# Altium PCB 门禁触摸板.PcbDoc
Units mil, origin at the board's own origin, x right, y up, seen from the top; angles counter-clockwise.
Board outline 4137 x 2347.85 mil, 2 copper layers (Top Layer, Bottom Layer); 33 components, 30 nets, 117 pads, 126 vias.
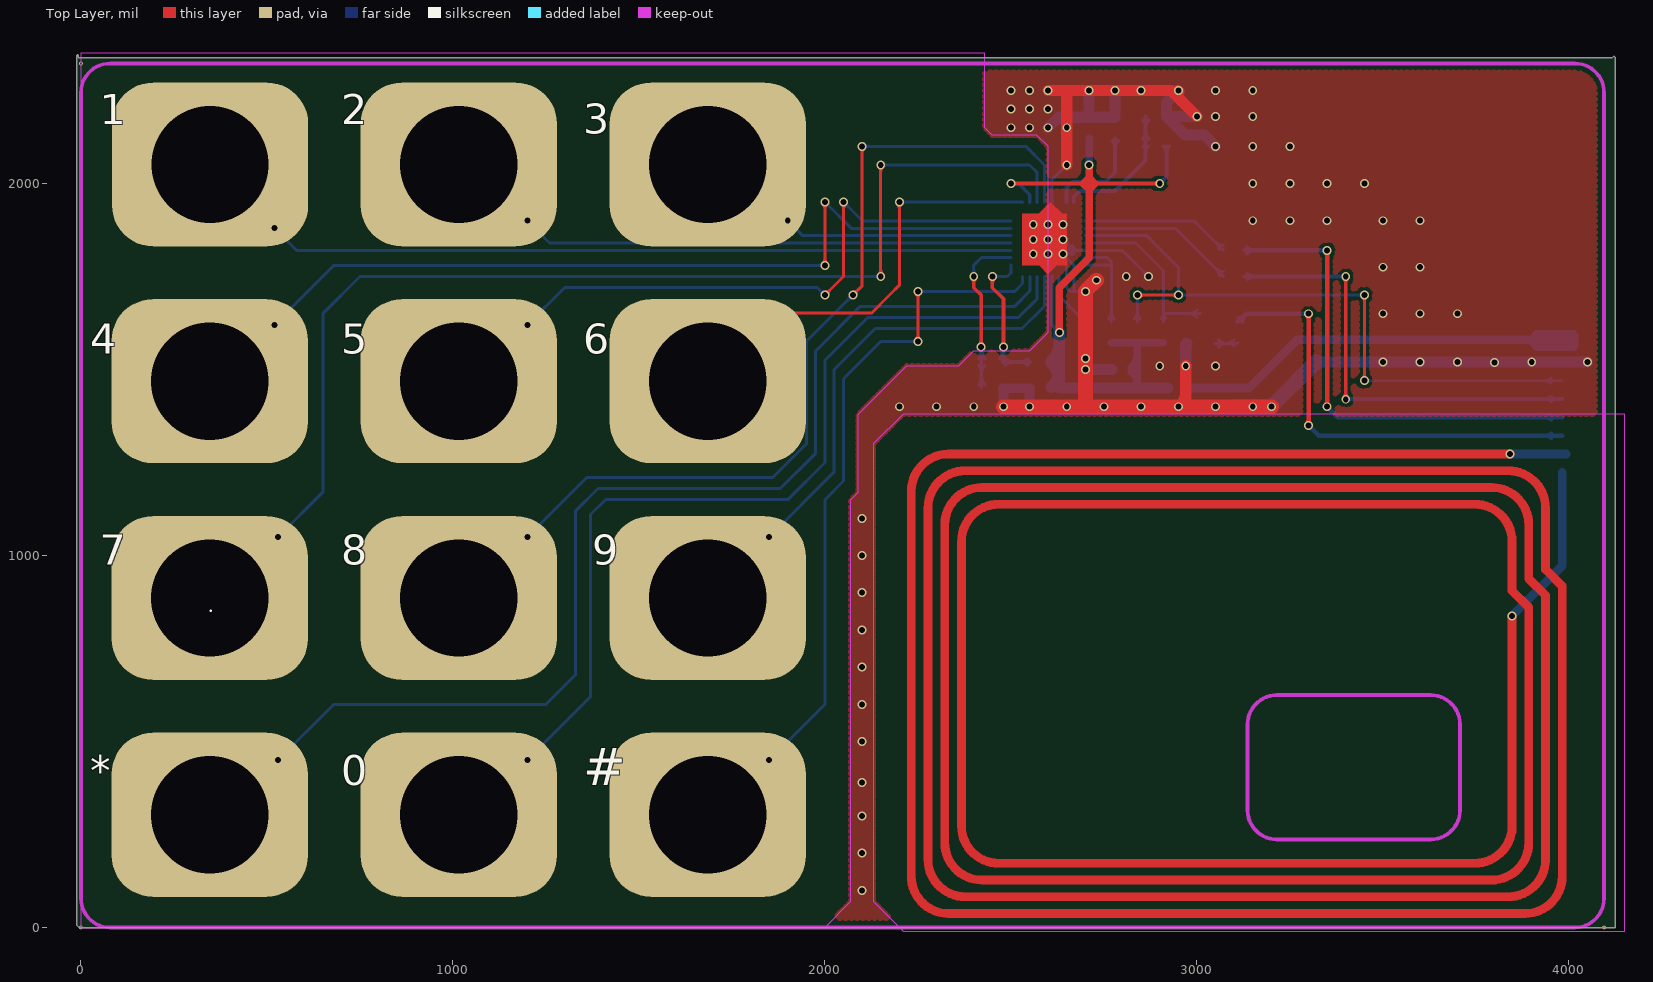
[diagram p0: Top Layer view]
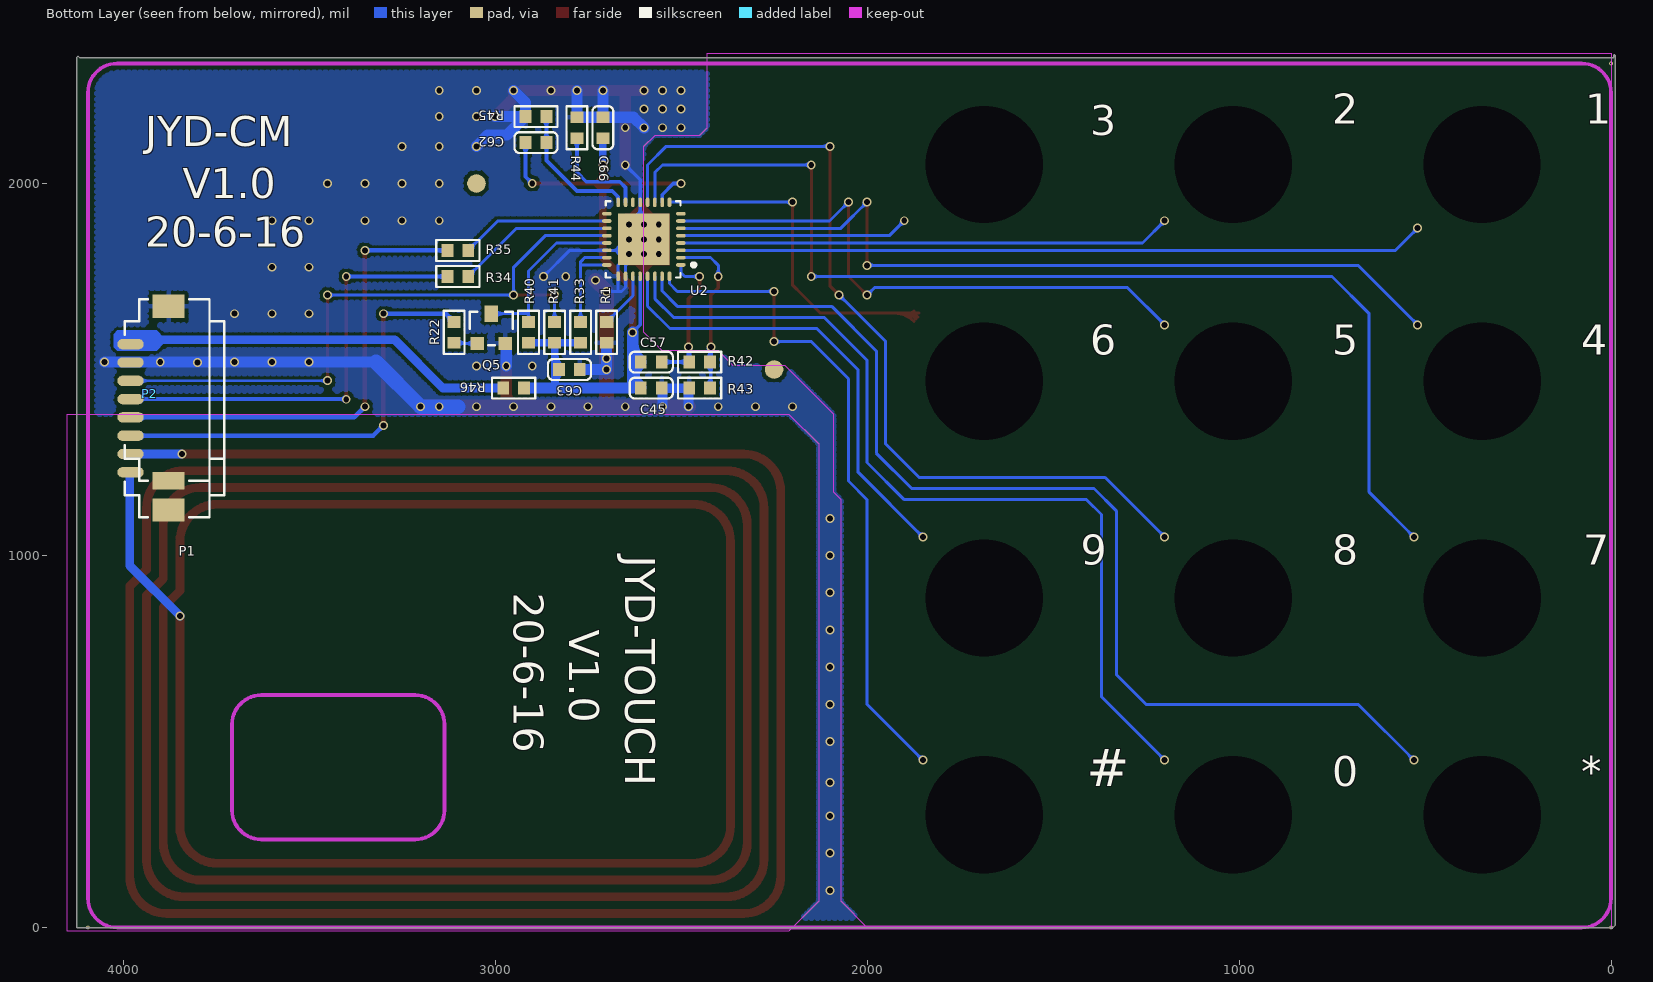
[diagram p1: Bottom Layer view, seen from below]
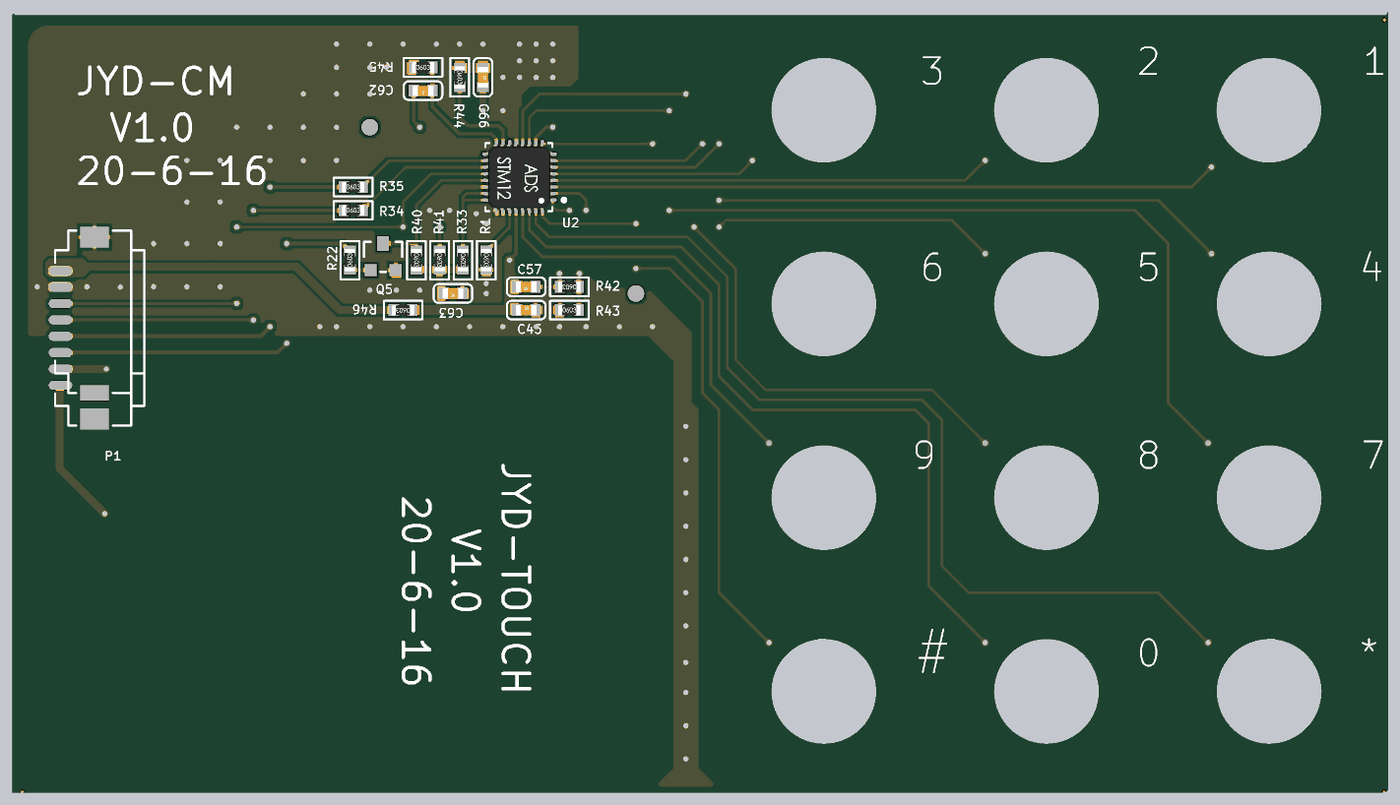
[diagram p2: 3D render of the assembled board from below, using the file's embedded part models]

## Layer stack, top to bottom
Top Layer: signal copper 1.4
Dielectric: dielectric 12.6, FR-4, Dk 4.8
Bottom Layer: signal copper 1.4

## Board outline
-8.87,2346.76 -11.87,2343.76 -11.87,6.76 -4.03,-1.09 4125.13,-1.09 4125.13,2338.76 4121.13,2342.76 4115.79,2337.42 -6.14,2337.42

## Design rules (kind name [scope] priority, off if disabled: settings)
Clearance Clearance_2 [InComponent('U2')] p1: gap=7.87
Clearance Clearance_1 [(IsThruPin)or(IsFill)or(InPoly)or(IsKeepOut) vs (IsThruPin)or(IsFill)or(InPoly)or(IsKeepOut)] p2: gap=12
Clearance [All] p3: gap=8
ComponentClearance [All] p1: gap=0 collisioncheckmode=3 verticalgap=0 showdistances=FALSE
FabricationTestpoint [(IsPad And (OnTopLayer Or OnBottomLayer))] p1: side=3 testpointundercomponent=TRUE minsize=40 maxsize=100 preferedsize=60 minholesize=0 maxholesize=40 preferedholesize=32 testpointgrid=1 allowsidetop=TRUE allowsidebottom=TRUE usegrid=TRUE gridtolerance=0.01
HoleSize [All] p1: absolutevalues=TRUE maxlimit=393.7 minlimit=1 maxpercent=80.000 minpercent=20.000
MinimumSolderMaskSliver [All] p1: minsoldermaskwidth=0
PolygonConnect PolygonConnect_1 [IsVia] p1: connectstyle=Direct reliefconductorwidth=10 reliefentries=4 polygonreliefangle="90 Angle" airgapwidth=10
PolygonConnect [All] p2: connectstyle=Relief reliefconductorwidth=12 reliefentries=4 polygonreliefangle="90 Angle" airgapwidth=10
RoutingVias [All] p1: holewidth=15.75 width=23.62 viastyle="Through Hole" minholewidth=15.75 minwidth=23.62 maxholewidth=15.75 maxwidth=23.62
SilkToSilkClearance [All] p1: silktosilkclearance=0
SilkToSolderMaskClearance [IsPad] p1: minsilkscreentomaskgap=0 clearancetoexposedcopper=TRUE
SolderMaskExpansion [All] p1: expansion=4
Width [All] p1: maxlimit=80 minlimit=5 preferedwidth=10
22 further rules are at their usual default settings.

## Components (designator, comment, footprint, x,y, rotation, side; value= is the part's Value field where it differs from the comment)
0 "PAD" 焊盘1 1015.75,303.15 r0 top (schematic designator 10)
1 "PAD" 焊盘1 347.13,2051.18 r0 top
2 "PAD" 焊盘1 1015.75,2051.18 r0 top
3 "PAD" 焊盘1 1685.04,2051.18 r0 top
4 "PAD" 焊盘1 346.46,1468.5 r0 top
5 "PAD" 焊盘1 1015.75,1468.5 r0 top
6 "PAD" 焊盘1 1685.04,1468.5 r0 top
7 "PAD" 焊盘1 346.46,885.83 r0 top
8 "PAD" 焊盘1 1015.75,885.83 r0 top
9 "PAD" 焊盘1 1685.04,885.83 r0 top
# "PAD" 焊盘1 1685.04,303.15 r0 top (schematic designator #1)
* "PAD" 焊盘1 346.46,303.15 r0 top (schematic designator *1)
C45 "1uF" 0603C 2580,1450 r180 bottom
C57 "820P 1%" 0603C 2580,1520 r0 bottom
C62 "0.1uF" 0603C 2890,2110 r0 bottom
C63 "0.1uF" 0603C 2800,1500 r0 bottom
C66 "0.1uF" 0603C 2710,2150 r270 bottom
P1 "Header 8" 8P-1.25mm 3980,1396 r90 bottom (schematic designator P?)
P2 "Header 6" 6P-1.25MM 3980,1445 r90 bottom
Q5 "PMBT3904" SOT-23-3L 3010,1610 r180 bottom
R1 "2M1%" 0603R 2700,1600 r270 bottom
R22 "10K" 0603R 3110,1600 r90 bottom
R33 "10K" 0603R 2770,1600 r270 bottom
R34 "10R" 0603R 3100,1750 r180 bottom
R35 "10R" 0603R 3100,1820 r180 bottom
R40 "10K" 0603R 2910,1600 r270 bottom
R41 "10K" 0603R 2840,1600 r270 bottom
R42 "510K1%" 0603R 2450,1520 r0 bottom
R43 "2M1%" 0603R 2450,1450 r180 bottom
R44 "36K 1%" 0603R 2780,2150 r270 bottom
R45 "330K" 0603R 2890,2180 r180 bottom
R46 "0R-空" 0603R 2950,1450 r0 bottom
U2 "TSM12M" ADS_TMS12 2600,1850 r0 bottom

## Footprints (in the part's own frame and the unit in brackets; to place one, negate y for a bottom-side part, rotate by r counter-clockwise, add the part's x,y. Pads: shape width x height; smd on the part's side, far side on the other; paste and mask are expansions set on the pad)
6P-1.25MM [mm]
  oval 0.7x1.8 smd mask+0.05: 1(-3.125,0) 2(-1.875,0) 3(-0.625,0) 4(0.625,0) 5(1.875,0) 6(3.125,0)
  rect 1.2x2.2 smd mask+0.05: 7(-6.2,-2.6)
  rect 1.6x2.2 smd mask+0.05: 8(5.7,-2.6)
  silkscreen extent -6.2,-6.4 6.2,0.4
8P-1.25mm [mm]
  oval 0.7x1.8 smd mask+0.05: 1(-4.375,0) 2(-3.125,0) 3(-1.875,0) 4(-0.625,0) 5(0.625,0) 6(1.875,0) 7(3.125,0) 8(4.375,0)
  rect 1.6x2.2 smd mask+0.05: 9(-6.95,-2.6) 10(6.95,-2.6)
  silkscreen extent -7.45,-6.4 7.45,0.4
0603C [mm]
  rect 0.8x0.9 smd: 1(-0.711,0) 2(0.711,0)
  silkscreen extent -1.47,-0.71 1.47,0.71, body extent -0.8,-0.4 0.8,0.4, height 0.3
0603R [mm]
  rect 0.8x0.9 smd: 1(-0.711,0) 2(0.711,0)
  silkscreen extent -1.47,-0.71 1.47,0.71, body extent -0.85,-0.4 0.85,0.4, height 0.56
ADS_TMS12 [mm]
  oval 0.65x0.25 smd: 1(-2.525,1.75) 2(-2.525,1.25) 3(-2.525,0.75) 4(-2.525,0.25) 5(-2.525,-0.25) 6(-2.525,-0.75) 7(-2.525,-1.25) 8(-2.525,-1.75) 17(2.525,-1.75) 18(2.525,-1.25) 19(2.525,-0.75) 20(2.525,-0.25) 21(2.525,0.25) 22(2.525,0.75) 23(2.525,1.25) 24(2.525,1.75)
  oval 0.25x0.65 smd: 9(-1.75,-2.525) 10(-1.25,-2.525) 11(-0.75,-2.525) 12(-0.25,-2.525) 13(0.25,-2.525) 14(0.75,-2.525) 15(1.25,-2.525) 16(1.75,-2.525) 25(1.75,2.525) 26(1.25,2.525) 27(0.75,2.525) 28(0.25,2.525) 29(-0.25,2.525) 30(-0.75,2.525) 31(-1.25,2.525) 32(-1.75,2.525)
  rect 3.5x3.5 smd: 33(0,0)
  silkscreen extent -3.52,-2.6 2.6,2.6, body extent -2.46,-2.49 2.54,2.51, height 0.9
SOT-23-3L [mil]
  rect 36x36 smd: 1(-37.4,-40) 2(37.4,-40)
  rect 36x43.31 smd: 3(0,40)
  silkscreen extent -57,-45 58,45
焊盘1 [mm]
  rrect50% 13.4x11.2 / inner rrect50% 13.4x11.2 / far side rect 0x0 hole 8 unplated: 1(0,0)
  round 1.2 smd: 1(4.445,4.445)

## Part data
0 1 2 3 4 5 6 7 8 9 # *: library part TestPoint, "Test Point"
C45: library part C-C?, "Electrolytic Capacitor"
C57 C62 C63 C66: library part CAP, "Capacitor"
P1: "Header, 8-Pin"
Q5: library part NPN_BJT, "Bipolar Junction Transistor"
R1 R22 R33 R40 R41 R42 R43 R44 R45: library part RES2
R34 R35: library part R_Dup1
R46: library part POWER-R

## Free pads (board coordinates)
  round 10 hole 5: 1(0,0) 2(0,2322.83) 3(4094.49,0)
  round 50 smd far side: MARK(2250,1500) MARK(3050,2000)

## Via types
v1: diameter 24, hole 16, Top Layer to Bottom Layer, tented both sides, 126 vias

## Nets (pads, with @x,y where several pads share a name; then routed paths per layer and width w, separated by ;. In a path a pad name is that pad's centre, name@x,y a point inside that pad or via, vN(x,y) a via of type N, cw(c..) or ccw(c..) an arc to the next point about the centre after c; other vN are vias at no path point)
ANTENNA: P1.1 P1.2 | length 21208.7
  Top Layer w23.62: 2232.13,135.76 2232.13,137.76 ; 3802.13,127.76 3792.13,127.76 ; 3842.13,82.76 3837.13,82.76 ; 3842.13,1227.76 3837.13,1227.76 ; v1(3842.13,1272.76) 2332.13,1272.76 ccw(c2332.13,1172.76) 2232.13,1173.76 ; 3847.13,257.76 3847.13,272.76 ; v1(3847.13,837.76) 3847.13,272.76 ; 3892.13,217.76 3892.13,227.76 ; 3937.13,177.76 3937.13,182.76 ; 3982.13,132.11 3982.13,137.76 ; 2232.13,137.76 ccw(c2332.13,137.76) 2332.13,37.76 3882.13,37.76 ccw(c3882.13,137.76) 3982.13,137.76 ; 2232.13,137.76 2232.13,1172.76 ; 2232.13,1172.76 cw(c2332.13,1172.76) 2232.13,1173.76 ; 2232.13,1172.76 cw(c2332.13,1172.76) 2232.13,1173.76 ; 2232.13,1172.76 2232.13,1173.76 ; 3792.13,127.76 ccw(c3792.13,227.76) 3892.13,227.76 ; 3792.13,127.76 2422.13,127.76 cw(c2422.13,227.76) 2322.13,227.76 2322.13,1082.76 cw(c2422.13,1082.76) 2422.13,1182.76 3792.13,1182.76 cw(c3792.13,1082.76) 3892.13,1082.76 3892.13,937.76 3937.13,892.76 3937.13,182.76 ; 3837.13,82.76 ccw(c3837.13,182.76) 3937.13,182.76 ; 3837.13,82.76 2377.13,82.76 cw(c2377.13,182.76) 2277.13,182.76 2277.13,1127.76 cw(c2377.13,1127.76) 2377.13,1227.76 3837.13,1227.76 ; 3837.13,1227.76 cw(c3837.13,1127.76) 3937.13,1127.76 3937.13,962.76 3982.13,917.76 3982.13,137.76 ; 3847.13,272.76 cw(c3747.13,272.76) 3747.13,172.76 2467.13,172.76 cw(c2467.13,272.76) 2367.13,272.76 2367.13,1037.76 cw(c2467.13,1037.76) 2467.13,1137.76 3747.13,1137.76 cw(c3747.13,1037.76) 3847.13,1037.76 3847.13,905.76 3892.13,860.76 3892.13,227.76
  Bottom Layer w23.62: v1(3842.13,1272.76) P1.2@3992.13,1272.76 ; v1(3847.13,837.76) 3982.13,972.76 P1.1@3982.13,1223.76
GND: C45.2 C63.1 C66.1 P1.7 P1.10 P2.5 P2.8 Q5.2 R1.2 R43.1 R44.1 R45.1 U2.13 U2.22 U2.25 U2.26 U2.33 | length 5695.9
  Top Layer w30: v1(2600,2250) 2650,2250 ; v1(2650,2050) v1(2650,2150) 2650,2250 ; v1@2947,2250 ccw(c2988.04,2250) 2959.02,2220.98 ; v1@2951.57,2247.44 cw(c2942.41,2262.41) 2930,2250 ; v1@2952.12,1397.88 ccw(c2908.96,1441.04) 2970,1441.04 ; 2970,1400 v1(2970,1510) ; v1(3000,2180) 2930,2250 ; 2650,2250 v1(2710,2250) v1(2780,2250) v1(2850,2250) 2930,2250
  Top Layer w40: v1(2480,1400) v1(2550,1400) 2700,1400 ; v1(2730,1740) v1(2700,1710) v1(2700,1500) 2700,1400 ; v1(3200,1400) 2970,1400 2700,1400
  Bottom Layer w8: U2.33@2600,1842 cw(c2600,1822.69) 2613.66,1836.34 cw(c2627.31,1850) U2.33@2608,1850 ; v1(2600,1850) U2.33@2629.53,1820.47 ; U2.33@2632,1810 ccw(c2612.69,1810) 2626.34,1823.66 ccw(c2640,1837.31) U2.33@2640,1818 ; U2.33@2632.85,1851.69 ccw(c2665.72,1853.38) U2.33@2665.72,1820.47 ; U2.33@2634.34,1804.34 cw(c2598.45,1768.45) 2649.21,1768.45 ; U2.33@2634.34,1815.66 cw(c2645.97,1804.03) U2.33@2645.97,1820.47 ; U2.33@2637.88,1842.29 cw(c2634.44,1829.78) U2.33@2646.78,1833.78 ; U2.33@2640,1802 cw(c2640,1782.69) 2653.66,1796.34 cw(c2667.31,1810) U2.33@2648,1810 ; v1(2640,1850) cw(c2635.62,1831.46) U2.33@2653.75,1837.33 ; U2.33@2640.23,1809.77 cw(c2666.08,1783.92) U2.33@2666.08,1820.47 ; U2.33@2640.84,1852.1 ccw(c2674.14,1853.81) 2674.14,1820.47 ; U2.33@2642.43,1817.62 ccw(c2647.73,1834.25) U2.33@2656.46,1819.13 ; U2.33@2645.66,1804.34 cw(c2684.6,1765.4) 2684.6,1820.47 ; U2.33@2646.25,1835.4 cw(c2659.92,1839.83) U2.33@2647.12,1846.36 ; U2.33@2647.73,1807.93 cw(c2665.33,1803.21) U2.33@2656.22,1819 ; U2.33@2648.83,1852.51 ccw(c2682.56,1854.25) 2682.56,1820.47 ; U2.33@2649.21,1787.76 ccw(c2617.76,1787.76) v1(2640,1810) ; U2.33@2655.5,1809.66 cw(c2648.03,1822.59) v1(2640,1810) ; U2.33@2665.28,1820.47 ccw(c2665.28,1784.72) v1(2640,1810) ; v1@2694.34,1704.34 ccw(c2680.69,1690.69) 2680.69,1710 ccw(c2680.69,1729.31) v1@2694.34,1715.66 ; v1(2700,1710) 2668.9,1710 ; v1@2862,1750 ccw(c2842.69,1750) 2856.34,1763.66 ccw(c2870,1777.31) v1@2870,1758 ; v1(2870,1750) 2799.53,1820.47 U2.22 U2.33@2629.53,1820.47 ; U2.33@2629.53,1820.47 v1(2640,1810) ; v1(2640,1810) U2.33@2649.21,1800.79 ; U2.33@2649.21,1800.79 2668.9,1781.1 U2.25 2668.9,1710 ; U2.33@2649.21,1800.79 U2.26 2649.21,1720.79 2660,1710 2668.9,1710
  Bottom Layer w10: U2.33@2584.36,1901.58 ccw(c2573.95,1935.93) 2609.84,1935.93 ; U2.33@2587.27,1892.01 ccw(c2578.04,1922.45) 2609.84,1922.45 ; U2.33@2595.05,1854.95 ccw(c2559.34,1890.66) U2.33@2609.84,1890.66 ; U2.33@2595.05,1894.95 ccw(c2559.34,1930.66) 2609.84,1930.66 ; U2.33@2596.08,1884.2 cw(c2578.55,1858.28) U2.33@2609.84,1858.28 ; U2.33@2601.68,1892.49 cw(c2591.29,1877.11) U2.33@2609.84,1877.11 ; U2.33@2602.12,1847.88 ccw(c2583.48,1866.52) U2.33@2609.84,1866.52 ; U2.33@2602.12,1887.88 ccw(c2583.48,1906.52) U2.33@2609.84,1906.52 ; U2.33@2606.48,1892.65 cw(c2634.81,1904.21) U2.33@2607.78,1918.55 ; U2.33@2607.28,1900.77 cw(c2604.02,1895.95) U2.33@2609.84,1895.95 ; U2.33@2609.19,1880.81 ccw(c2607.62,1882.38) U2.33@2609.84,1882.38 ; U2.33@2609.84,1859.84 U2.13 2609.84,2009.84 v1(2650,2050) ; 2609.84,1931.02 ccw(c2652.47,1931.02) U2.33@2629.3,1895.24 ; U2.33@2618.21,1907.52 ccw(c2641.99,1928.99) U2.33@2640.36,1896.99 ; v1@2643,2050 cw(c2626.1,2050) 2638.05,2038.05 cw(c2650,2026.1) v1@2650,2043
  Bottom Layer w26: v1(2480,1400) 2480,1448 R43.1 C45.2 2550,1448 v1(2550,1400)
  Bottom Layer w30: v1(2600,2150) 2628,2178 C66.1 ; R1.2 v1(2700,1500) C63.1 ; v1(2710,2250) C66.1 ; v1(2780,2250) R44.1 C66.1 ; v1(2950,2250) 2918,2218 R45.1 ; v1(2970,1510) 2970,1567.4 Q5.2 ; v1(3000,2180) R45.1 ; v1(3050,2100) 3020,2130 2968,2130 R45.1 ; 3320,1520 v1(4050,1520)
  Bottom Layer w40: 3100,1400 v1(3200,1400) 3320,1520
  other v1: 2100,100 2100,200 2100,300 2100,390 2100,500 2100,600 2100,700 2100,800 2100,900 2100,1000 2100,1100 2200,1400 2300,1400 2400,1400 2650,1400 2750,1400 2850,1400 2950,1400 3050,1400 3150,1400 2900,1510 3050,1510 3800,1519.03 3500,1520 3600,1520 3700,1520 3900,1520 2700,1530 3500,1650 3600,1650 3700,1650 2810,1750 3500,1775 3600,1775 2560,1810 2600,1810 2560,1850 2560,1890 2600,1890 2640,1890 3150,1900 3250,1900 3350,1900 3500,1900 3600,1900 3150,2000 3250,2000 3350,2000 3450,2000 3150,2100 3250,2100 2500,2150 2550,2150 3050,2180 3150,2180 2500,2200 2550,2200 2600,2200 2500,2250 2550,2250 3050,2250 3150,2250
IRQ_TSM12: P1.6 P2.4 R41.1 U2.20 | length 2189.7
  Top Layer w8: v1(2840,1700) v1(2950,1700) ; v1@2845.66,1694.34 cw(c2859.31,1680.69) 2859.31,1700 cw(c2859.31,1719.31) v1@2845.66,1705.66 ; v1@2944.48,1694.48 ccw(c2931.14,1681.14) 2931.14,1700 ccw(c2931.14,1718.86) v1@2944.48,1705.52 ; v1@3444.48,1475.52 ccw(c3431.14,1488.86) 3450,1488.86 ccw(c3468.86,1488.86) v1@3455.52,1475.52 ; v1@3444.48,1694.48 cw(c3431.14,1681.14) 3450,1681.14 cw(c3468.86,1681.14) v1@3455.52,1694.48 ; v1@3450,1469.82 v1(3450,1700)
  Bottom Layer w8: U2.20 2865.16,1859.84 2950,1775 2950,1750 v1(2950,1700) v1(3450,1700) ; R41.1@2831.69,1636.31 ccw(c2811.64,1656.36) 2840,1656.36 ccw(c2868.36,1656.36) R41.1@2848.31,1636.31 ; v1@2834.34,1694.34 cw(c2820.69,1680.69) 2840,1680.69 cw(c2859.31,1680.69) v1@2845.66,1694.34 ; R41.1 v1(2840,1700) ; v1@2944.48,1705.52 ccw(c2931.14,1718.86) 2950,1718.86 ccw(c2968.86,1718.86) 2955.52,1705.52 ccw(c2968.86,1718.86) 2968.86,1700 ccw(c2968.86,1681.14) v1@2955.52,1694.48 ; v1@3444.48,1694.48 ccw(c3431.14,1681.14) 3431.14,1700 ccw(c3431.14,1718.86) v1@3444.48,1705.52 ; v1@3450,1469.82 P1.6 ; v1@3455.52,1464.48 cw(c3468.42,1451.58) 3468.42,1469.82 ; v1@3455.52,1475.52 ccw(c3469.29,1489.29) 3469.29,1469.82 ; 3934.22,1469.82 cw(c3934.22,1445.48) P1.6@3951.43,1462.69 ; 3935.25,1469.82 ccw(c3935.25,1492.7) P1.6@3951.43,1476.52 ; P1.6@3951.43,1462.9 ccw(c3934.74,1446.21) 3934.74,1469.82 ccw(c3934.74,1493.43) P1.6@3951.43,1476.73
  other v1: 3450,1470
KEY0: 0.1 U2.30 | length 2422.9
  Bottom Layer w8: v1(1200,450) 1370,620 1370,1110 1410,1150 1900,1150 2000,1250 2000,1525 2115,1640 2520,1640 2570.47,1690.47 U2.30 ; v1@1200,458 ccw(c1200,477.31) 1213.66,463.66 ccw(c1227.31,450) v1@1208,450
KEY1: 1.1 U2.3 | length 2035.6
  Bottom Layer w8: v1@520,1872 cw(c520,1852.69) 533.66,1866.34 cw(c547.31,1880) v1@528,1880 ; v1(520,1880) 579.53,1820.47 U2.3
KEY2: 2.1 U2.4 | length 1355.7
  Bottom Layer w8: v1@1200,1892 cw(c1200,1872.69) 1213.66,1886.34 cw(c1227.31,1900) v1@1208,1900 ; v1(1200,1900) 1259.84,1840.16 U2.4
KEY3: 3.1 U2.5 | length 647.6
  Bottom Layer w8: v1@1900,1892 cw(c1900,1872.69) 1913.66,1886.34 cw(c1927.31,1900) v1@1908,1900 ; v1(1900,1900) 1940.16,1859.84 1990.16,1859.84 U2.5
KEY4: 4.1 U2.6 | length 2427.7
  Top Layer w8: v1@1994.34,1785.66 ccw(c1980.69,1799.31) 2000,1799.31 ccw(c2019.31,1799.31) v1@2005.66,1785.66 ; v1@1994.34,1944.34 cw(c1980.69,1930.69) 2000,1930.69 cw(c2019.31,1930.69) v1@2005.66,1944.34 ; v1(2000,1780) v1(2000,1950)
  Bottom Layer w8: v1(520,1620) 680,1780 760,1780 ; v1@520,1628 ccw(c520,1647.31) 533.66,1633.66 ccw(c547.31,1620) v1@528,1620 ; 790,1780 760,1780 ; v1@1994.34,1774.34 ccw(c1980.69,1760.69) 1980.69,1780 ccw(c1980.69,1799.31) v1@1994.34,1785.66 ; v1(2000,1780) 760,1780 ; v1@2000,1942 cw(c2000,1922.69) 2013.66,1936.34 cw(c2027.31,1950) v1@2008,1950 ; v1(2000,1950) 2070.47,1879.53 U2.6
KEY5: 5.1 U2.7 | length 1743.7
  Top Layer w8: v1(2000,1700) 2050,1750 v1(2050,1950) ; v1@2000,1708 ccw(c2000,1727.31) 2013.66,1713.66 ccw(c2027.31,1700) v1@2008,1700 ; v1@2044.34,1944.34 cw(c2030.69,1930.69) 2050,1930.69 cw(c2069.31,1930.69) v1@2055.66,1944.34
  Bottom Layer w8: v1(1200,1620) 1300,1720 1370,1720 1980,1720 v1(2000,1700) ; v1@1200,1628 ccw(c1200,1647.31) 1213.66,1633.66 ccw(c1227.31,1620) v1@1208,1620 ; v1@1992,1700 ccw(c1972.69,1700) 1986.34,1713.66 ccw(c2000,1727.31) v1@2000,1708 ; v1@2050,1942 cw(c2050,1922.69) 2063.66,1936.34 cw(c2077.31,1950) v1@2058,1950 ; v1(2050,1950) 2100.79,1899.21 U2.7
KEY6: 6.1 U2.9 | length 1132.2
  Top Layer w8: 6.1@1860.04,1651.38 2125,1651.38 2175,1701.38 2200,1726.38 v1(2200,1950) ; 6.1@1862.6,1640.94 cw(c1887.79,1615.75) 6.1@1887.79,1651.38 ; 6.1@1868.26,1635.29 cw(c1907.11,1596.44) 6.1@1907.11,1651.38 ; 6.1@1873.91,1629.63 cw(c1926.42,1577.12) 1926.42,1651.38 ; 6.1@1873.91,1657.38 ccw(c1888.4,1671.87) 6.1@1888.4,1651.38 ; v1@2194.34,1944.34 cw(c2180.69,1930.69) 2200,1930.69 cw(c2219.31,1930.69) v1@2205.66,1944.34
  Bottom Layer w8: v1(2200,1950) 2530.51,1950 U2.9 ; v1@2205.66,1944.34 cw(c2219.31,1930.69) 2219.31,1950 cw(c2219.31,1969.31) v1@2205.66,1955.66
KEY7: 7.1 U2.11 | length 3151.9
  Top Layer w8: v1@2144.34,1755.66 ccw(c2130.69,1769.31) 2150,1769.31 ccw(c2169.31,1769.31) v1@2155.66,1755.66 ; v1@2144.34,2044.34 cw(c2130.69,2030.69) 2150,2030.69 cw(c2169.31,2030.69) v1@2155.66,2044.34 ; v1(2150,1750) v1(2150,2050)
  Bottom Layer w8: v1(530,1050) 650.13,1170.13 650.13,1650.13 750,1750 v1(2150,1750) ; v1@530,1058 ccw(c530,1077.31) 543.66,1063.66 ccw(c557.31,1050) v1@538,1050 ; v1@2144.34,1744.34 ccw(c2130.69,1730.69) 2130.69,1750 ccw(c2130.69,1769.31) v1@2144.34,1755.66 ; v1(2150,2050) 2550,2050 2570.47,2029.53 U2.11 ; v1@2155.66,2044.34 cw(c2169.31,2030.69) 2169.31,2050 cw(c2169.31,2069.31) v1@2155.66,2055.66
KEY8: 8.1 U2.12 | length 2558.7
  Top Layer w8: v1(2075,1700) 2100,1725 ; v1@2075,1708 ccw(c2075,1727.31) 2088.66,1713.66 ccw(c2102.31,1700) v1@2083,1700 ; v1@2094.34,2094.34 cw(c2080.69,2080.69) 2100,2080.69 cw(c2119.31,2080.69) v1@2105.66,2094.34 ; 2100,1805 2100,1725 ; v1(2100,2100) 2100,1725
  Bottom Layer w8: v1(1200,1050) 1360,1210 1860,1210 1950,1300 1950,1575 v1(2075,1700) ; v1@1200,1058 ccw(c1200,1077.31) 1213.66,1063.66 ccw(c1227.31,1050) v1@1208,1050 ; v1@2067,1700 cw(c2047.69,1700) 2061.34,1686.34 cw(c2075,1672.69) v1@2075,1692 ; v1(2100,2100) 2540,2100 2590.16,2049.84 U2.12 ; v1@2105.66,2094.34 cw(c2119.31,2080.69) 2119.31,2100 cw(c2119.31,2119.31) v1@2105.66,2105.66
KEY9: 9.1 U2.29 | length 1269.7
  Top Layer w8: 9.1@1849.21,1050 v1(1850,1050)
  Bottom Layer w8: v1(1850,1050) 2025,1225 2025,1500 2135,1610 2530,1610 2590.16,1670.16 U2.29 ; v1@1850,1058 ccw(c1850,1077.31) 1863.66,1063.66 ccw(c1877.31,1050) v1@1858,1050
KEY#: #.1 U2.32 | length 1945.3
  Top Layer w8: v1@2244.34,1580.66 ccw(c2230.69,1594.31) 2250,1594.31 ccw(c2269.31,1594.31) v1@2255.66,1580.66 ; v1@2244.34,1704.34 cw(c2230.69,1690.69) 2250,1690.69 cw(c2269.31,1690.69) v1@2255.66,1704.34 ; v1(2250,1575) v1(2250,1710)
  Bottom Layer w8: v1(1850,450) 2000,600 2000,1150 2050,1200 2050,1475 2150,1575 v1(2250,1575) ; v1@1850,458 ccw(c1850,477.31) 1863.66,463.66 ccw(c1877.31,450) v1@1858,450 ; v1@2244.34,1569.34 ccw(c2230.69,1555.69) 2230.69,1575 ccw(c2230.69,1594.31) v1@2244.34,1580.66 ; v1(2250,1710) 2510,1710 2531.1,1731.1 U2.32 ; v1@2255.66,1704.34 cw(c2269.31,1690.69) 2269.31,1710 cw(c2269.31,1729.31) v1@2255.66,1715.66
KEY*: *.1 U2.31 | length 3032
  Bottom Layer w8: v1(530,450) 680,600 1250,600 1330,680 1330,1120 1390,1180 1880,1180 1975,1275 1975,1550 2095,1670 2510,1670 2550.79,1710.79 U2.31 ; v1@530,458 ccw(c530,477.31) 543.66,463.66 ccw(c557.31,450) v1@538,450
M3V3: P1.8 P2.6 R46.2 | length 1126.9
  Bottom Layer w23.62: R46.2 3140,1450 3270,1580 P1.8@3980,1580 ; 3924.7,1580 cw(c3924.7,1534.38) P1.8@3956.95,1566.64 ; 3925.21,1580 cw(c3925.21,1535.11) P1.8@3956.95,1566.85
NetC57_1: C57.1 R42.2 U2.1 | length 650.7
  Top Layer w10: v1@2445.05,1745.05 cw(c2433.1,1733.1) 2450,1733.1 cw(c2466.9,1733.1) v1@2454.95,1745.05 ; v1(2450,1750) 2450,1720 2480,1690 v1(2480,1560) ; v1@2475.05,1564.95 ccw(c2463.1,1576.9) 2480,1576.9 ccw(c2496.9,1576.9) v1@2484.95,1564.95
  Bottom Layer w8: v1(2450,1750) 2490,1750 2500.59,1760.59 U2.1 ; v1@2455.66,1744.34 cw(c2469.31,1730.69) 2469.31,1750 cw(c2469.31,1769.31) v1@2455.66,1755.66
  Bottom Layer w10: R42.2@2470.4,1529.57 ccw(c2447.22,1552.74) v1@2480,1552.74 ; v1@2474.02,1556.35 cw(c2455.57,1545.09) 2476.45,1539.5 ; v1@2475.05,1555.05 cw(c2463.1,1543.1) 2480,1543.1 ; 2478.61,1547.57 cw(c2488.74,1544.85) v1@2483.5,1553.94 ; v1(2480,1560) 2480,1522 R42.2 C57.1 ; v1@2484.95,1555.05 ccw(c2496.9,1543.1) 2480,1543.1 ; R42.2@2485.6,1512.4 cw(c2503.95,1494.05) 2503.95,1520 cw(c2503.95,1545.95) R42.2@2485.6,1527.6 ; R42.2@2485.6,1529.57 cw(c2499.12,1543.09) 2480,1543.09 ; C57.1@2544.4,1512.4 ccw(c2526.05,1494.05) 2526.05,1520 ccw(c2526.05,1545.95) C57.1@2544.4,1527.6
NetC62_1: C62.1 R45.2 U2.16 | length 488.9
  Bottom Layer w10: U2.16@2668.82,1957.28 cw(c2684.6,1957.28) 2673.44,1968.44 ; U2.16 2668.9,1963.9 2685,1980 2755,1980 2780,1980 2862,2062 2862,2087 ; C62.1@2854.4,2119.57 ccw(c2836.05,2137.92) 2862,2137.92 ccw(c2887.95,2137.92) C62.1@2869.6,2119.57 ; R45.2@2854.4,2170.43 cw(c2836.05,2152.08) 2862,2152.08 cw(c2887.95,2152.08) R45.2@2869.6,2170.43 ; C62.1@2855.7,2099.32 cw(c2846.8,2087) 2862,2087 ; R45.2 C62.1 2862,2087 ; C62.1@2868.3,2099.32 ccw(c2877.2,2087) 2862,2087
NetQ5_1: Q5.1 R22.1 | length 161.1
  Bottom Layer w8: Q5.1 3108,1570 R22.1 ; Q5.1@3057.3,1560.1 cw(c3081.2,1536.2) 3081.2,1570 cw(c3081.2,1603.8) Q5.1@3057.3,1579.9 ; 3074.84,1570 ccw(c3074.84,1605.19) R22.1@3099.72,1580.31 ; 3084.5,1570 cw(c3084.5,1548.47) R22.1@3099.72,1563.69
NetR1_1: R1.1 U2.27 | length 196.3
  Bottom Layer w8: U2.27 2629.53,1698.47 R1.1 ; 2676.58,1651.42 cw(c2653.17,1628) R1.1@2686.28,1628 ; 2681.34,1646.66 ccw(c2698.03,1663.36) R1.1@2698.03,1639.75
NetR33_1: R33.1 U2.23 U2.24 | length 352.2
  Bottom Layer w8: U2.24 2770,1781.1 ; U2.23 2759.21,1800.79 2770,1790 2770,1781.1 ; R33.1@2761.69,1636.31 ccw(c2741.64,1656.36) 2770,1656.36 ccw(c2798.36,1656.36) R33.1@2778.31,1636.31 ; R33.1 2770,1781.1
NetR34_2: R34.2 U2.19 | length 470.8
  Bottom Layer w8: U2.19 2942.47,1879.53 R34.2 ; 3048.58,1773.42 ccw(c3072,1796.83) R34.2@3072,1763.72 ; 3053.34,1768.66 cw(c3036.64,1751.97) R34.2@3060.25,1751.97
NetR35_2: R35.2 U2.18 | length 450
  Bottom Layer w8: U2.18 2992.79,1899.21 R35.2 ; 3048.58,1843.42 ccw(c3072,1866.83) R35.2@3072,1833.72 ; 3053.34,1838.66 cw(c3036.64,1821.97) R35.2@3060.25,1821.97
NetR42_1: R42.1 R43.2 U2.2 | length 703.5
  Top Layer w10: v1@2395.05,1745.05 cw(c2383.1,1733.1) 2400,1733.1 cw(c2416.9,1733.1) v1@2404.95,1745.05 ; v1(2400,1750) 2400,1720 2420,1700 v1(2420,1560) ; v1@2415.05,1564.95 ccw(c2403.1,1576.9) 2420,1576.9 ccw(c2436.9,1576.9) v1@2424.95,1564.95
  Bottom Layer w8: v1@2394.34,1755.66 ccw(c2380.69,1769.31) 2400,1769.31 ccw(c2419.31,1769.31) v1@2405.66,1755.66 ; v1(2400,1750) 2400,1780 2420.79,1800.79 U2.2
  Bottom Layer w10: R43.2@2414.4,1459.57 ccw(c2400.88,1473.09) 2420,1473.09 ; R42.1@2414.4,1510.43 cw(c2400.88,1496.91) 2420,1496.91 ; R42.1@2414.4,1529.57 ccw(c2400.88,1543.09) 2420,1543.09 ; v1@2415.05,1555.05 cw(c2403.1,1543.1) 2420,1543.1 ; v1@2416.5,1553.94 cw(c2411.26,1544.85) 2421.39,1547.57 ; R43.2@2420,1452 v1(2420,1560) ; 2420,1482.74 ccw(c2452.78,1482.74) R43.2@2429.6,1459.57 ; 2420,1487.26 cw(c2452.78,1487.26) R42.1@2429.6,1510.43 ; v1@2420,1552.75 ccw(c2452.78,1552.75) R42.1@2429.6,1529.57 ; 2423.55,1539.5 cw(c2444.43,1545.1) v1@2425.98,1556.35 ; v1@2424.95,1555.05 ccw(c2436.9,1543.1) 2420,1543.1
NetR44_2: R44.2 U2.15 | length 320.2
  Bottom Layer w10: U2.15 2649.21,1989.21 2665,2005 2755,2005 2780,2030 R44.2 ; R44.2@2772.4,2114.4 cw(c2754.05,2096.05) 2780,2096.05 cw(c2805.95,2096.05) R44.2@2787.6,2114.4
SCL: P1.4 P2.2 R35.1 | length 1472.9
  Top Layer w12: v1@3345.76,1404.24 ccw(c3335.51,1414.49) 3350,1414.49 ccw(c3364.49,1414.49) v1@3354.24,1404.24 ; v1@3345.76,1815.76 cw(c3335.51,1805.51) 3350,1805.51 cw(c3364.49,1805.51) v1@3354.24,1815.76 ; v1(3350,1400) v1(3350,1820)
  Bottom Layer w12: R35.1 v1(3350,1820) ; R35.1@3134.89,1813.11 cw(c3151.53,1796.47) 3151.53,1820 cw(c3151.53,1843.53) R35.1@3134.89,1826.89 ; v1@3345.76,1815.76 ccw(c3335.51,1805.51) 3335.51,1820 ccw(c3335.51,1834.49) v1@3345.76,1824.24 ; v1@3350,1394 cw(c3350,1379.51) 3360.24,1389.76 cw(c3370.49,1400) v1@3356,1400 ; v1(3350,1400) 3378.39,1371.61 P1.4@3982.13,1371.61 ; 3938.54,1371.61 cw(c3938.54,1351.37) P1.4@3952.85,1365.68 ; 3939.05,1371.61 cw(c3939.05,1352.1) P1.4@3952.85,1365.89 ; 3940.08,1371.61 ccw(c3940.08,1389.66) P1.4@3952.85,1376.89 ; 3940.59,1371.61 ccw(c3940.59,1388.94) P1.4@3952.85,1376.68
SDA: P1.5 P2.3 R34.1 | length 1398
  Top Layer w10: v1@3395.05,1424.95 ccw(c3383.1,1436.9) 3400,1436.9 ccw(c3416.9,1436.9) v1@3404.95,1424.95 ; v1@3395.05,1745.05 cw(c3383.1,1733.1) 3400,1733.1 cw(c3416.9,1733.1) v1@3404.95,1745.05 ; v1(3400,1420) v1(3400,1750)
  Bottom Layer w10: R34.1 v1(3400,1750) ; R34.1@3135.6,1742.4 cw(c3153.95,1724.05) 3153.95,1750 cw(c3153.95,1775.95) R34.1@3135.6,1757.6 ; v1@3395.05,1745.05 ccw(c3383.1,1733.1) 3383.1,1750 ccw(c3383.1,1766.9) v1@3395.05,1754.95 ; v1(3400,1420) 3400.82,1420.82 P1.5@3982.13,1420.82 ; v1@3404.95,1415.05 cw(c3418.88,1401.12) 3418.88,1420.82 ; v1@3404.95,1424.95 ccw(c3414.92,1434.92) 3414.92,1420.82 ; 3936.12,1420.82 cw(c3936.12,1398.17) P1.5@3952.14,1414.19 ; 3936.64,1420.82 cw(c3936.64,1398.9) P1.5@3952.14,1414.4 ; 3937.66,1420.82 ccw(c3937.66,1441.29) P1.5@3952.14,1426.81 ; 3938.18,1420.82 ccw(c3938.18,1440.56) P1.5@3952.14,1426.6
TSM3V3: C45.1 C57.2 C62.2 C63.2 C66.2 R33.2 R40.2 R41.2 R46.1 U2.10 U2.28 | length 2423.7
  Top Layer w10: v1(2500,2000) 2710,2000 v1(2900,2000) ; v1@2895.05,1995.05 ccw(c2883.1,1983.1) 2883.1,2000 ccw(c2883.1,2016.9) v1@2895.05,2004.95
  Top Layer w20: v1(2630,1600) 2630,1720 2710,1800 2710,2000 v1(2710,2050)
  Bottom Layer w10: v1(2500,2000) 2520.79,2000 2550.79,1970 U2.10 ; v1@2504.95,1995.05 cw(c2516.9,1983.1) 2516.9,2000 cw(c2516.9,2016.9) v1@2504.95,2004.95 ; U2.28 2609.84,1620.16 v1(2630,1600) ; v1@2623,1600 ccw(c2606.1,1600) 2618.05,1611.95 ccw(c2630,1623.9) v1@2630,1607 ; v1(2900,2000) 2918,2018 C62.2@2918,2100 ; v1@2900,2007 ccw(c2900,2023.9) 2911.95,2011.95 ccw(c2923.9,2000) v1@2907,2000 ; C62.2@2910.4,2100.43 cw(c2892.05,2082.08) 2918,2082.08 cw(c2943.95,2082.08) C62.2@2925.6,2100.43
  Bottom Layer w20: v1(2710,2050) C66.2 ; R33.2 R41.2 ; C63.2@2823.94,1493.97 cw(c2785.15,1455.18) 2840,1455.18 ; C63.2@2823.94,1506.03 ccw(c2785.15,1544.82) 2840,1544.82 ; 2840,1450 R41.2 ; R40.2 R41.2
  Bottom Layer w30: C45.1@2607.47,1452.5 ccw(c2553.08,1506.89) 2630,1506.89 ; C57.2@2607.47,1517.5 cw(c2553.08,1463.11) 2630,1463.11 ; C57.2@2607.47,1522.5 ccw(c2553.08,1576.89) 2630,1576.89 ; v1(2630,1600) 2630,1450 2840,1450 R46.1
TSM12_EN: Q5.3 R40.1 U2.21 | length 560.7
  Bottom Layer w8: U2.21 2834.84,1840.16 2910,1765 2910,1650 ; R40.1@2903.47,1637.76 ccw(c2895.28,1650) 2910,1650 ; R40.1 2910,1650 ; R40.1@2916.53,1637.76 cw(c2924.72,1650) 2910,1650 ; Q5.3@3000.1,1640.1 ccw(c2976.2,1616.2) 2976.2,1650 ccw(c2976.2,1683.8) Q5.3@3000.1,1659.9 ; Q5.3 2910,1650
VDD3V3: P1.3 P2.1 R22.2 | length 1379.7
  Top Layer w12: v1@3295.76,1354.24 ccw(c3285.51,1364.49) 3300,1364.49 ccw(c3314.49,1364.49) v1@3304.24,1354.24 ; v1@3295.76,1645.76 cw(c3285.51,1635.51) 3300,1635.51 cw(c3314.49,1635.51) v1@3304.24,1645.76 ; v1(3300,1350) v1(3300,1650)
  Bottom Layer w12: R22.2 3132,1650 v1(3300,1650) ; R22.2@3111.97,1637.75 ccw(c3111.97,1656.53) R22.2@3125.25,1643.25 ; R22.2@3121.72,1628 cw(c3150,1628) 3130,1648 ; v1@3295.76,1645.76 ccw(c3285.51,1635.51) 3285.51,1650 ccw(c3285.51,1664.49) v1@3295.76,1654.24 ; v1@3300,1344 cw(c3300,1329.51) 3310.24,1339.76 cw(c3320.49,1350) v1@3306,1350 ; v1(3300,1350) 3327.61,1322.39 P1.3@3982.13,1322.39 ; 3938.54,1322.39 cw(c3938.54,1302.16) P1.3@3952.85,1316.47 ; 3939.05,1322.39 cw(c3939.05,1302.89) P1.3@3952.85,1316.68 ; 3940.08,1322.39 ccw(c3940.08,1340.45) P1.3@3952.85,1327.68 ; 3940.59,1322.39 ccw(c3940.59,1339.72) P1.3@3952.85,1327.47
pads on no net: P1.9 P2.7 U2.8 U2.14 U2.17

## Polygon pours and split planes (outlines as drawn)
GND on Bottom Layer "Top Layer-No Net" (hatched 45Degree grid 11 track 15, remove dead copper, pour order 4): -10,2340 4120,2340 4120,-25 -10,-25 -10,2340
GND on Top Layer "Top Layer-No Net" (hatched 45Degree grid 11 track 15, remove dead copper, pour order 3): -10,2340 4120,2340 4120,-25 -10,-25 -10,2340

## Keep-outs
Keep-Out Layer:
  pour cut-out: 0,0 2000,0 2070,70 2070,1150 2090,1170 2090,1380 2220,1510 2360,1510 2400,1550 2550,1550 2600,1600 2600,2100 2570,2130 2450,2130 2430,2150 2430,2350 0,2350
  pour cut-out: 2130,1300 2130,70 2210,-10 4150,-10 4150,1380 2210,1380
  lines w10: 0,78.74 ccw(c78.74,78.74) 78.74,0 4015.75,0 ccw(c4015.75,78.74) 4094.49,78.74 4094.49,2244.09 ccw(c4015.75,2244.09) 4015.75,2322.83 78.74,2322.83 ccw(c78.74,2244.09) 0,2244.09 0,78.74 ; 3136.14,315.51 ccw(c3214.88,315.51) 3214.88,236.77 3628.39,236.76 ccw(c3628.39,315.51) 3707.13,315.51 3707.13,546.02 ccw(c3628.39,546.02) 3628.39,624.76 3214.88,624.76 ccw(c3214.88,546.02) 3136.14,546.02 3136.13,315.51

## Other copper
Top Layer:
  region net GND: 2625.87,1781.6 2601.23,1806.23 2575,1780 2599.64,1755.36
  region net GND: 2637.68,1919.76 2606.22,1951.22 2575,1920 2606.46,1888.54
  region net GND: 2650.99,1779.05 2650.99,1920 2530,1920 2530,1779.05
  region net TSM3V3: 2740,2000 2710,2030 2680,2000 2710,1970
Bottom Layer:
  region net GND: 2682.56,1820.47 2664.27,1838.77 2645.97,1820.47 2664.27,1802.18
  region net GND: 2634.16,1906.7 2609.84,1931.02 2585.52,1906.7 2609.84,1882.38
  region net M3V3: 4015,1605 4025,1595 4025,1560 4015,1550 3910,1550 3890,1570 3890,1585 3910,1605

## Silkscreen, mask and mechanical layers (free items; w line width, h text height)
Top Overlay:
  lines w5.91: 349.13,851.76 349.13,851.76
Bottom Overlay:
  text "1" at 70,2160 h80
  text "2" at 750,2160 h80
  text "3" at 1400,2130 h80
  text "JYD-CM" at 3940,2100 h80
  text "V1.0" at 3840,1960 h80
  text "20-6-16" at 3940,1830 h80
  text "4" at 80,1540 h80
  text "5" at 750,1540 h80
  text "6" at 1400,1540 h80
  text "JYD-TOUCH" at 2650,1000 h80 r90
  text "7" at 75,975 h80
  text "8" at 750,975 h80
  text "9" at 1425,975 h80
  text "20-6-16" at 2950,900 h80 r90
  text "V1.0" at 2800,800 h80 r90
  text "*" at 80,380 h80
  text "0" at 750,380 h80
  text "#" at 1410,380 h100
Mechanical 2:
  lines w10: 70.87,137.8 70.87,2224.41 1960.63,2224.41 1960.63,137.8 70.87,137.8
Mechanical 3:
  circle w5: c348.65,298.76 r157.48
  circle w5: c1016.65,293.76 r157.48
  circle w5: c1686.65,298.76 r157.48
  circle w5: c1688.65,888.76 r157.48
  circle w5: c1022.65,882.76 r157.48
  circle w5: c348.65,887.76 r157.48
  circle w5: c348.65,1480.76 r157.48
  circle w5: c1019.65,1478.76 r157.48
  circle w5: c1685.65,1477.76 r157.48
  circle w5: c1685.65,2046.76 r157.48
  circle w5: c1019.65,2048.76 r157.48
  circle w5: c352.65,2049.76 r157.48
  lines w10: -7.87,303.15 2000,303.15 ; -7.87,885.83 2000,885.83 ; -7.87,1181.1 2000,1181.1 ; -7.87,1468.5 2000,1468.5 ; -7.87,2051.18 2000,2051.18 ; 346.46,-39.37 346.46,2362.2 ; 1015.75,-39.37 1015.75,2362.2 ; 1685.04,-39.37 1685.04,2362.2

## Dimensions
0,0 to 0,2322.83 on Mechanical 1
0,0 to 4094.49,0 on Mechanical 1